# EAGLE board Transponder Proaut V4 (EAGLE 7.7.0)
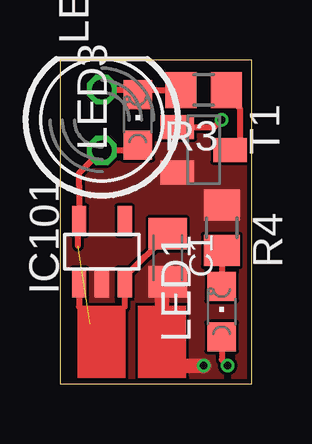
[diagram p0: board, top side]
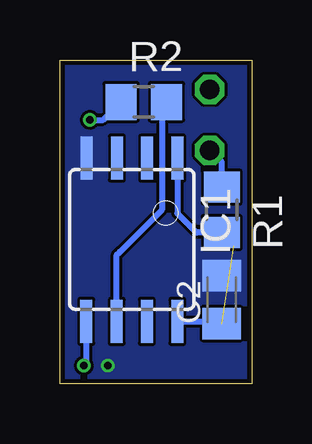
[diagram p1: board, bottom side, seen from below]

Size 8 x 13.5 mm. Coordinates in mm from the lower left corner, seen from the top.
Outline: 0,13.5 0,0 8,0 8,13.5 0,13.5
Copper layers (1*16): Top 0.018mm / dielectric 1.55mm / Bottom 0.018mm
Design rules "Multi-CB_2L_125um-Tracks_OL35um": minimum track width 0.125mm, minimum drill 0.2mm, track to track 0.125mm, track to pad 0.125mm, pad to pad 0.125mm, via to via 0.125mm, smd to smd 0mil, copper to edge 0.2mm, drill to drill 0.2mm, minimum pad ring 0.125mm, minimum via ring 0.125mm, stop-mask expansion 2mil, vias tented up to drill 0.45mm, thermal gap 0.2mm
Net classes: 0 default: width 0.254 mm, drill 0.406 mm, clearance 0.203 mm; 1 POWER: width 0.508 mm, clearance 0.102 mm

## Footprints (pad centres in the part's own frame; a part is rotated, then mirrored left to right if it is on the bottom)
C0805K = smd 1.3 x 1.6: 1 -1,0; 2 1,0
8S2 = smd 0.5 x 1.8: 1 -1.905,-3.404; 2 -0.645,-3.404; 3 0.625,-3.404; 4 1.895,-3.404; 5 1.905,3.404; 6 0.635,3.404; 7 -0.635,3.404; 8 -1.905,3.404
SOT23-5 = smd 0.6 x 1.2: 1 -0.95,-1.306; 2 0,-1.306; 3 0.95,-1.306; 4 0.95,1.306; 5 -0.95,1.306
CHIPLED_0805 = smd 1.2 x 1.2: A 0,-1.05; C 0,1.05
LED5MM = drill 0.813 octagon: A -1.27,0; K 1.27,0
R0805@1 = smd 1.3 x 1.5: 1 -0.95,0; 2 0.95,0
SOT23-BEC = smd 1 x 1.4: B -0.95,-1.1; C 0,1.1; E 0.95,-1.1

## Placement (x,y rotation side)
C1  10uF  [C0805K]  4.5,5.25 270 top
C2  10uF  [C0805K]  1.25,3.5 90 bottom
IC1  TINY85-20PU  [8S2]  5,6 180 bottom
IC101  LC1463CB5ATR33  [SOT23-5]  1.75,5.5 0 top
LED1  [CHIPLED_0805]  6.75,3 0 top
LED2  IR  [LED5MM]  1.75,11 90 top
LED3  IR (SMD)  [CHIPLED_0805]  3.25,11 0 top
R1  1k  [R0805@1]  1.25,7.25 270 bottom
R2  1k  [R0805@1]  4.5,11.75 0 bottom
R3  33  [R0805@1]  6,12.25 180 top
R4  [R0805@1]  6.75,6.5 270 top
T1  MMBT2222A  [SOT23-BEC]  6,9.75 270 top

## Library data of the parts
C1 C2 = rcl; OC_FARNELL: 2346925; OC_PROAUT: E005285
IC1 = atmel; MPN: ATTINY13-20SU; OC_FARNELL: 9171568; OC_NEWARK: 96K6522
IC101 = power; OC_PROAUT: E005094
LED1-LED3 = led
R1-R4 = rcl
T1 = transistor

## Nets
+3V3: C2.1 IC1.8 IC101.5 LED2.A LED3.A R1.1
BAT+: C1.1 IC101.1 IC101.3
GND [POWER]: C1.2 C2.2 IC1.4 IC101.2 R4.1 T1.E
IR_DATA: IC1.6 R2.2
N$2: LED2.K LED3.C R3.2
N$3: R3.1 T1.C
N$4: R2.1 T1.B
N$6: LED1.C R4.2
RESET: IC1.1 R1.2
STATUS_LED: IC1.5 LED1.A

## Tracks (layer width: path | path; a pad name or v marks a point on that pad's centre or on a via)
+3V3  (1 unrouted)
  Top 0.254: 0.75,5.75 0.75,6.76 IC101.5 0.8,8.28 0.8,8.78 LED2.A 3.03,9.73 LED3.A
  Bottom 0.254: IC1.8 1.85,2.6 C2.1 | R1.1 1.25,9.23 LED2.A
BAT+
  Top 0.254: 1.75,1.25 1.75,2.25 | 1.75,2.25 2.7,3.2 IC101.3 2.7,4.45 C1.1 | IC101.1 0.8,3.2 1.75,2.25
GND  (via drill 0.3)
  Top 0.254: 4.27,1.25 4.27,2.52
  Top 0.61: 4.27,2.52 4.27,4.02 C1.2 | v6,0.75 4.25,0.75
  pour Bottom (no thermals): -0.5,-0.5 10.5,-0.5 10.5,15.5 -0.5,15.5
  pour Top (no thermals): -0.5,-0.5 10.5,-0.5 10.5,15.5 -0.5,15.5
IR_DATA
  Bottom 0.254: R2.2 3.55,11.7 3.75,11.5 3.75,7.25 5.5,5.5 5.63,5.37 IC1.6
N$2
  Top 0.254: LED3.C 3.3,11.55 | R3.2 4,12.25 3.45,12.25 LED3.C | LED2.K 3.03,12.27 LED3.C
N$3
  Top 0.254: 7.25,9.75 T1.C 7.5,10.15 7.5,11.5 6.95,12.05 R3.1
N$4  (via drill 0.3)
  Top 0.254: T1.B 6.45,10.7 v6.75,11
  Bottom 0.254: v6.75,11 6.2,11 R2.1
N$6
  Top 0.254: R4.2 LED1.C
RESET
  Bottom 0.254: IC1.1 3.1,7.09 2.5,6.5 2.3,6.3 R1.2
STATUS_LED  (via drill 0.3)
  Top 0.254: LED1.A 6.75,1 v7,0.75
  Bottom 0.254: IC1.5 6.91,0.84 v7,0.75
(copper drawn outside any net)
  shapes: Top area x2